# Altium PCB PCB1.PcbDoc
Units mil, origin at the board's own origin, x right, y up, seen from the top; angles counter-clockwise.
Board outline 2559.07 x 3937 mil, 4 copper layers (Top Layer, 3V, GND, Bottom Layer), stack 23.756 mil thick; 36 components, 33 nets, 176 pads, 41 vias.
Unrouted connection lines stored in the file: 17.
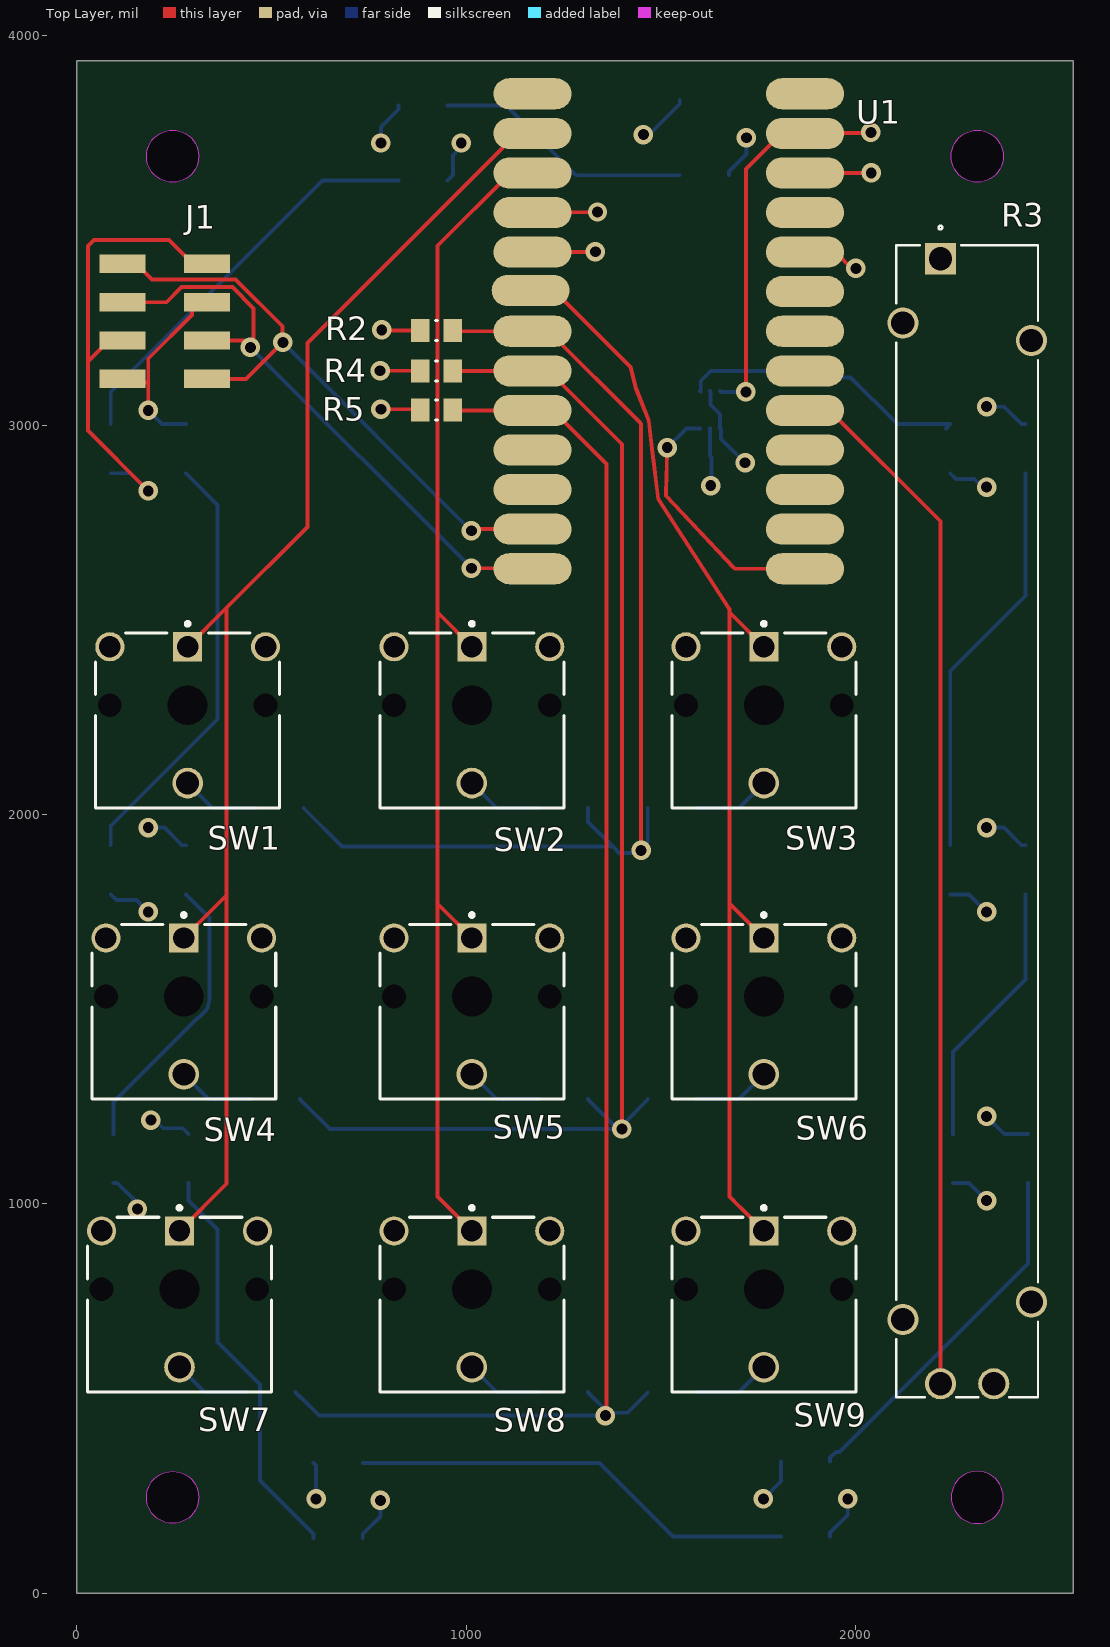
[diagram p0: Top Layer view]
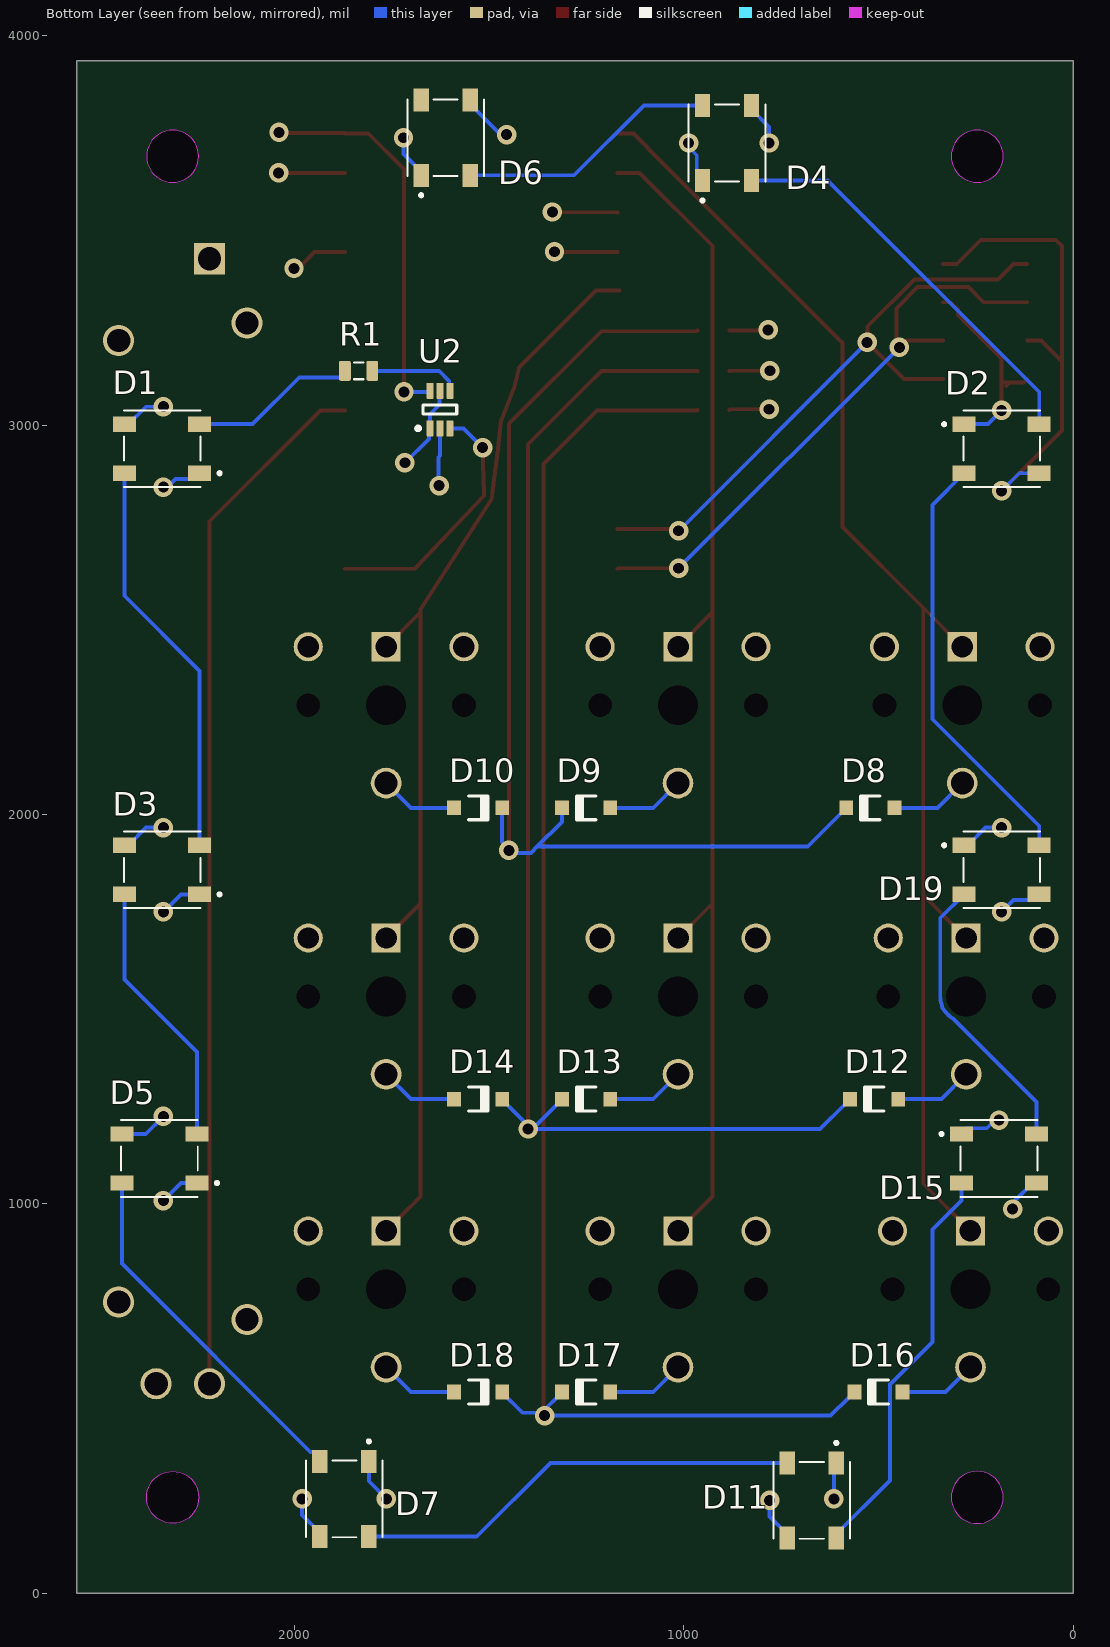
[diagram p1: Bottom Layer view, seen from below]
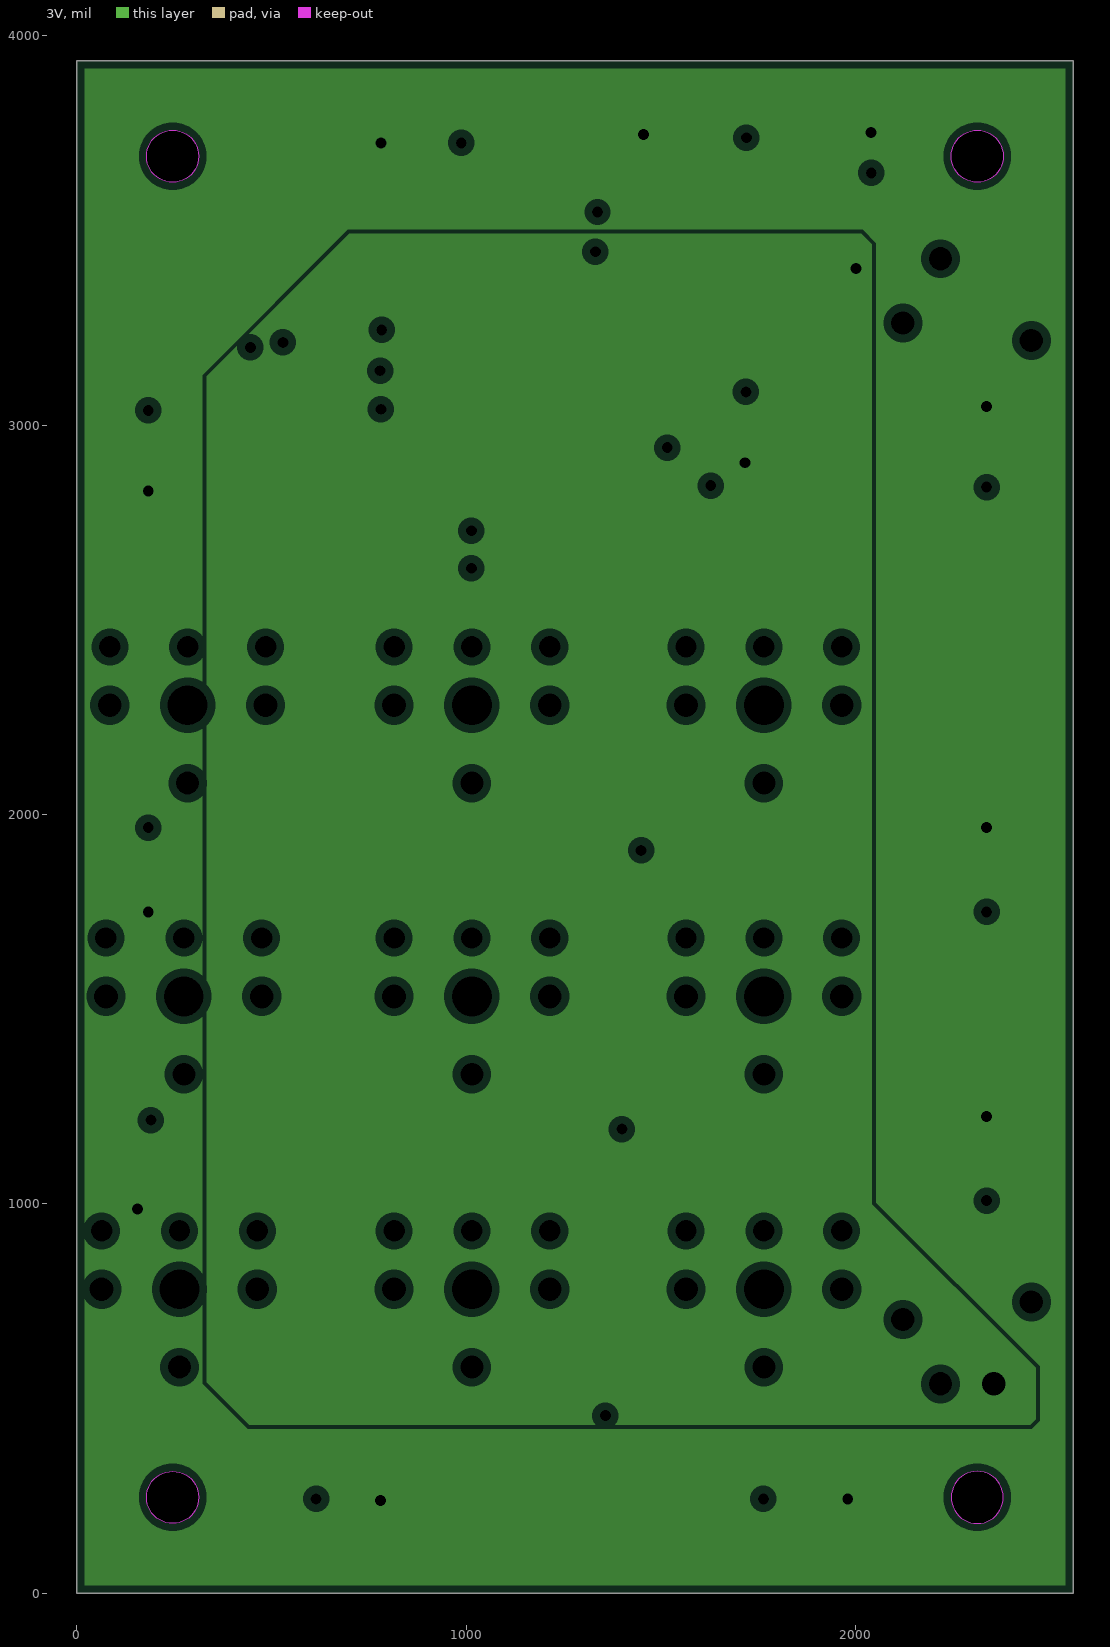
[diagram p2: 3V, clearances drawn from the general rule]
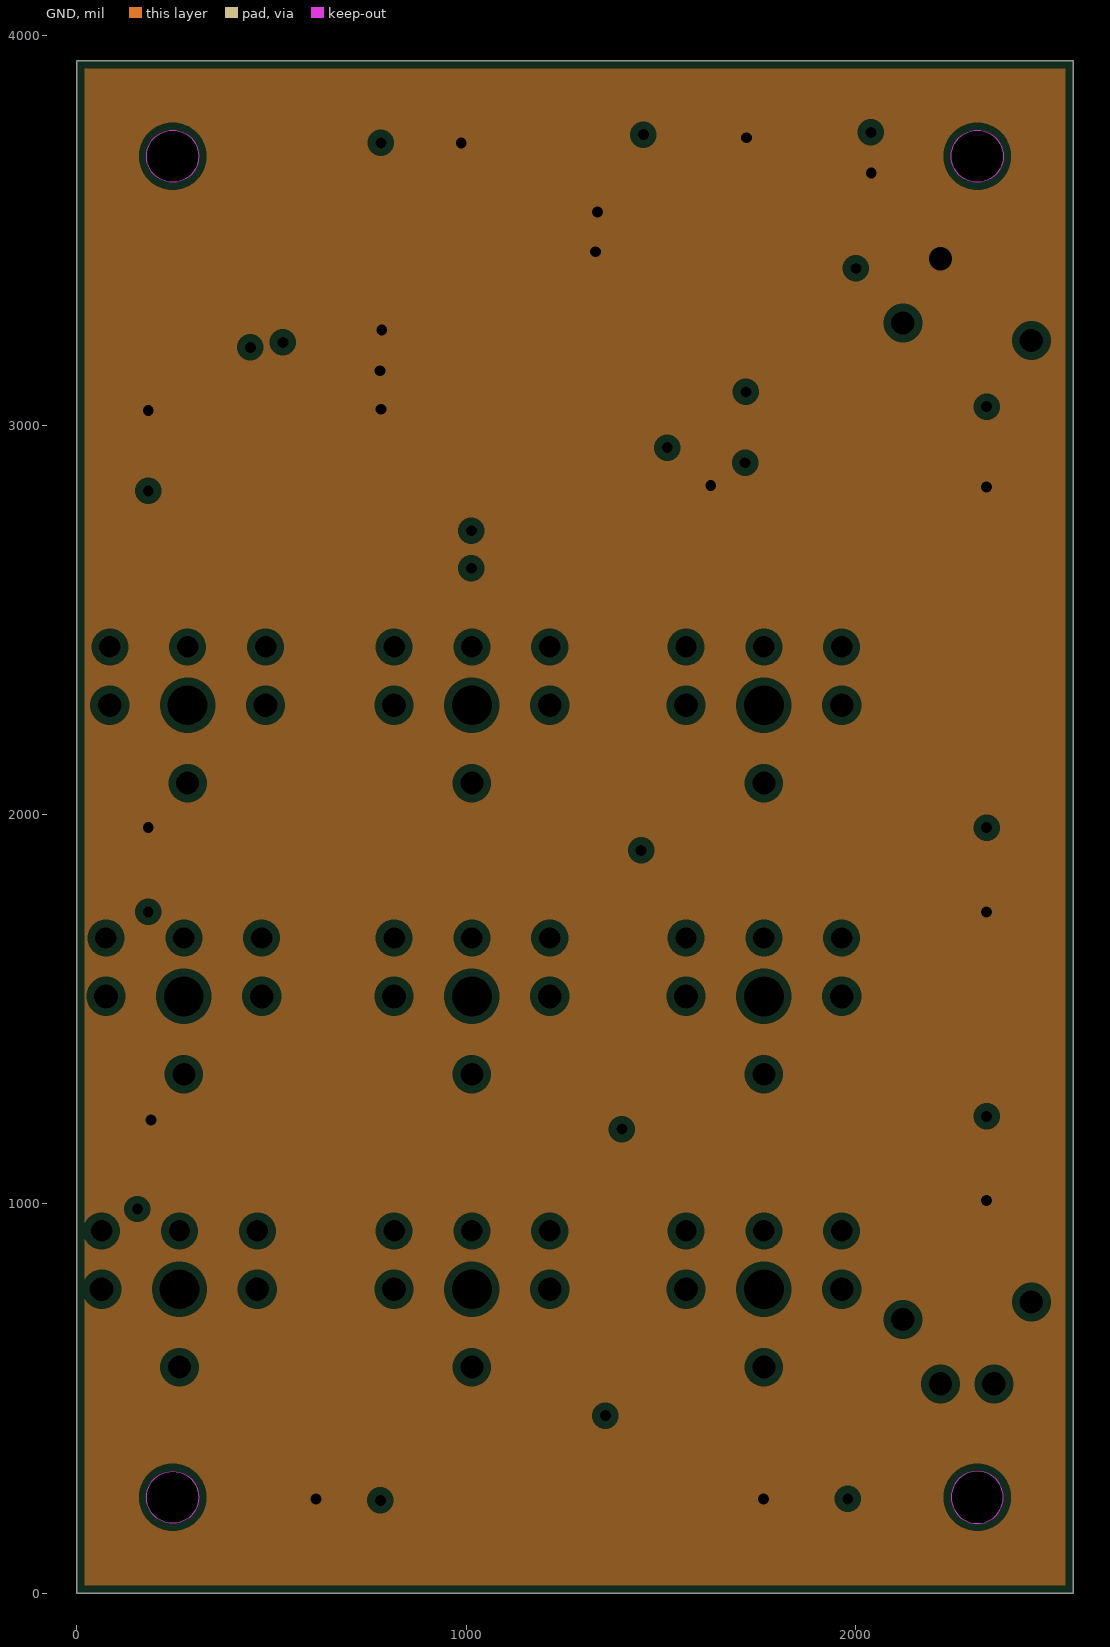
[diagram p3: GND, clearances drawn from the general rule]

## Layer stack, top to bottom
Top Solder: solder mask 0.4, Solder Resist, Dk 3.5
Top Layer: signal copper 1.4
Dielectric 2: prepreg 2.8, PP-006, Dk 4.1
3V: plane copper 1.378, net (Multiple Nets)
Dielectric 1: dielectric 12.6, FR-4, Dk 4.8
GND: plane copper 1.378, net GND
Dielectric 3: prepreg 2.8, PP-006, Dk 4.1
Bottom Layer: signal copper 1.4
Bottom Solder: solder mask 0.4, Solder Resist, Dk 3.5

## Board outline
0,0 2559.07,0 2559.07,3937 0,3937
cut-out: 2312.99,3624.02 cw(c2312.99,3690.94) 2246.06,3690.94 cw(c2312.99,3690.94) 2312.99,3757.87 cw(c2312.99,3690.94) 2379.92,3690.94 cw(c2312.99,3690.94)
cut-out: 246.06,3624.02 cw(c246.06,3690.94) 179.13,3690.94 cw(c246.06,3690.94) 246.06,3757.87 cw(c246.06,3690.94) 312.99,3690.94 cw(c246.06,3690.94)
cut-out: 2246.06,246.06 ccw(c2312.99,246.06) 2312.99,179.13 ccw(c2312.99,246.06) 2379.92,246.06 ccw(c2312.99,246.06) 2312.99,312.99 ccw(c2312.99,246.06)
cut-out: 246.06,3624.02 cw(c246.06,3690.94) 179.13,3690.94 cw(c246.06,3690.94) 246.06,3757.87 cw(c246.06,3690.94) 312.99,3690.94 cw(c246.06,3690.94)
cut-out: 246.06,179.13 cw(c246.06,246.06) 179.13,246.06 cw(c246.06,246.06) 246.06,312.99 cw(c246.06,246.06) 312.99,246.06 cw(c246.06,246.06)

## Design rules (kind name [scope] priority, off if disabled: settings)
Clearance Clearance_1 [All] p1: gap=10 ignorepadtopadclearanceinfootprint=FALSE except(5.91: Arc-SMDPad Track-SMDPad SMDPad-SMDPad; 7.87: Arc-Via Track-Via Via-Fill Via-Poly Via-Region; 9.84: Arc-Arc Arc-Track Track-Track; 13.78: Arc-THPad Track-THPad)
Clearance [All] p2 off: gap=10 ignorepadtopadclearanceinfootprint=FALSE
HoleSize HoleSize_1 [All] p1: absolutevalues=TRUE maxlimit=248.03 minlimit=5.91 maxpercent=80.000 minpercent=20.000
HoleSize [All] p2 off: absolutevalues=TRUE maxlimit=100 minlimit=1 maxpercent=80.000 minpercent=20.000
PlaneClearance [All] p1: clearance=20
PlaneConnect [All] p1: planeconnectstyle=Relief reliefexpansion=20 reliefentries=4 reliefconductorwidth=10 reliefairgap=10
PolygonConnect [All] p1: connectstyle=Relief reliefconductorwidth=10 reliefentries=4 polygonreliefangle="90 Angle" airgapwidth=10
RoutingVias [All] p1: holewidth=28 width=50 viastyle="Through Hole" minholewidth=28 minwidth=50 maxholewidth=28 maxwidth=50
SolderMaskExpansion [All] p1: expansion=4 istentingtop=FALSE
SupplyNets "Schematic Supply Nets_2" [InNet('GND')] p1: voltage=0.000
SupplyNets "Schematic Supply Nets_1" [InNet('3V3')] p2: voltage=0.000
SupplyNets "Schematic Supply Nets" [InNet('+5')] p3: voltage=0.000
Width "JLC Width" [All] p1: maxlimit=10 minlimit=6.3 preferedwidth=10 minimp=50.000000 maximp=50.000000 favimp=50.000000
Width [All] p2: maxlimit=10 minlimit=10 preferedwidth=10
27 further rules are at their usual default settings.

## Components (designator, comment, footprint, x,y, rotation, side; value= is the part's Value field where it differs from the comment)
D1 "1655" LED_1655 2340.08,2939.77 r0 bottom
D2 "1655" LED_1655 183.47,2939.77 r180 bottom
D3 "1655" LED_1655 2340.08,1858.09 r0 bottom
D4 "1655" LED_1655 889.04,3725.13 r90 bottom
D5 "1655" LED_1655 2346.9,1116.54 r0 bottom
D6 "1655" LED_1655 1611.75,3738.62 r90 bottom
D7 "1655" LED_1655 1872.02,242.05 r270 bottom
D8 "1N4148W-7-F" DIOD-SOD123-2_V 520.87,2017.15 r0 bottom
D9 "1N4148W-7-F" DIOD-SOD123-2_V 1250.98,2017.15 r0 bottom
D10 "1N4148W-7-F" DIOD-SOD123-2_V 1528.54,2017.15 r180 bottom
D11 "1655" LED_1655 671.3,238.18 r270 bottom
D12 "1N4148W-7-F" DIOD-SOD123-2_V 510.92,1269.14 r0 bottom
D13 "1N4148W-7-F" DIOD-SOD123-2_V 1250.98,1269.14 r0 bottom
D14 "1N4148W-7-F" DIOD-SOD123-2_V 1528.54,1269.14 r180 bottom
D15 "1655" LED_1655 190.29,1116.54 r180 bottom
D16 "1N4148W-7-F" DIOD-SOD123-2_V 499.83,516.72 r0 bottom
D17 "1N4148W-7-F" DIOD-SOD123-2_V 1250.98,516.72 r0 bottom
D18 "1N4148W-7-F" DIOD-SOD123-2_V 1528.54,516.72 r180 bottom
D19 "1655" LED_1655 183.47,1858.09 r180 bottom
J1 "NPTC042KFMS-RC" NPTC042KFMS-RC-Footprint-1 231.86,3276.71 r90 top
R1 "Resistor 470R +/-5% 0805 125 mW" RESC0805(2012)_L 1835.4,3139.83 r0 bottom value=470
R2 "Resistor 10k +/-1% 0805 125 mW" RESC2013X50X35ML15T15 923.92,3243.88 r0 top value=10k
R3 "PTA6043-2015DPB103" POT_PTA6043 2218.4,3427.77 r0 top
R4 "Resistor 10k +/-1% 0805 125 mW" RESC2013X50X35ML15T15 923.92,3139.19 r0 top value=10k
R5 "Resistor 10k +/-1% 0805 125 mW" RESC2013X50X35ML15T15 923.92,3039.68 r0 top value=10k
SW1 "ML1A-11JW" CHRY-ML1A-11JW_V 284.65,2280.93 r0 top
SW2 "ML1A-11JW" CHRY-ML1A-11JW_V 1014.76,2280.93 r0 top
SW3 "ML1A-11JW" CHRY-ML1A-11JW_V 1764.76,2280.93 r0 top
SW4 "ML1A-11JW" CHRY-ML1A-11JW_V 274.7,1532.92 r0 top
SW5 "ML1A-11JW" CHRY-ML1A-11JW_V 1014.76,1532.92 r0 top
SW6 "ML1A-11JW" CHRY-ML1A-11JW_V 1764.76,1532.92 r0 top
SW7 "ML1A-11JW" CHRY-ML1A-11JW_V 263.61,780.5 r0 top
SW8 "ML1A-11JW" CHRY-ML1A-11JW_V 1014.76,780.5 r0 top
SW9 "ML1A-11JW" CHRY-ML1A-11JW_V 1764.76,780.5 r0 top
U1 "KB2040" KB2040 1165.44,3891.5 r270 top
U2 "SN74LVC1T45DCKR" DCK0006A_M 1626.48,3040.23 r90 bottom

## Footprints (in the part's own frame and the unit in brackets; to place one, negate y for a bottom-side part, rotate by r counter-clockwise, add the part's x,y. Pads: shape width x height; smd on the part's side, far side on the other; paste and mask are expansions set on the pad)
CHRY-ML1A-11JW_V [mm] "Switch, 4-Leads, Body 12x11.4mm"
  rect 1.9x1.9 hole 1.4 paste-2539.97: 1(0,3.81)
  round 2 hole 1.5 paste-2539.97: 2(0,-5.08)
  round 1.9 hole 1.4 paste-2539.97: 3(-5.08,3.81) 4(5.08,3.81)
  round 0 hole 2.6 unplated paste-2539.97: MH1(0,0)
  round 0 hole 1.55 unplated paste-2539.97: MH2(-5.08,0) MH3(5.08,0)
  silkscreen extent -6,-6.7 6,5.43, body extent -6,-6.7 6,4.7, height 6.9
DCK0006A_M [mm] "SOT23, 6-Leads, Body 2.15x1.4mm, Pitch 0.65mm, IPC Low Density"
  rrect22% 1.05x0.45 smd: 1(-1.225,0.65) 2(-1.225,0) 3(-1.225,-0.65) 4(1.225,-0.65) 5(1.225,0) 6(1.225,0.65)
  silkscreen extent -1.35,-1.1 0.3,1.55, body extent -1.14,-1 1.14,1, height 0.94
DIOD-SOD123-2_V [mm] "SOD123, 2-Leads, Body 2.7x1.55mm, Height 1.45mm"
  rect 0.9x0.95 smd: 1(-1.575,0) 2(1.575,0)
  silkscreen extent -0.63,-0.83 0.64,0.77, body extent -1.35,-0.77 1.35,0.77, height 1.45
KB2040 [mil]
  oval 80x200 smd: 107(40,5) 108(141.67,5) 109(243.33,5) 110(345,5) 111(446.67,5) 112(545,0) 113(650,5) 114(751.67,5) 115(853.33,5) 116(955,5) 117(1056.67,5) 118(1158.33,5) 119(1260,5) 120(40,705) 121(141.67,705) 122(243.33,705) 123(345,705) 124(446.67,705) 125(548.33,705) 126(650,705) 127(751.67,705) 128(853.33,705) 129(955,705) 130(1056.67,705) 131(1158.33,705) 132(1260,705)
  body extent -48,0 1298,700, height 188
LED_1655 [mm]
  rect 1.5x1 smd: 1(-2.45,1.6) 2(-2.45,-1.6) 3(2.45,-1.6) 4(2.45,1.6)
  silkscreen extent -3.85,-2.5 2.5,2.5
NPTC042KFMS-RC-Footprint-1 [mm]
  rect 1.2x3 smd: 1(-4,2.9) 2(-1.5,2.9) 3(1,2.9) 4(3.5,2.9) 5(-4,-2.6) 6(-1.5,-2.6) 7(1,-2.6) 8(3.5,-2.6)
  body extent -5.63,-3.2 5.03,3.66, height 7.49
POT_PTA6043 [mil]
  rect 80x80 hole 60 paste-99999 mask+0: 1(0,0)
  round 80 / inner round 60 / far side round 80 hole 60 paste-99999 mask+0: 2(0,-2890) 3(137,-2890) 4(-96.5,-165) 5(-96.5,-2725) 6(233.5,-210) 7(233.5,-2680)
  silkscreen extent -114,-2925 250,85
RESC0805(2012)_L [mm] "Chip Resistor, Body 2.0x1.3mm, IPC High Density"
  rrect25% 0.76x1.3 smd: 1(-0.9,0) 2(0.89,0)
  silkscreen extent -0.3,-0.55 0.3,0.55, body extent -1,-0.62 1,0.63, height 0.6
RESC2013X50X35ML15T15 [mm] "Chip Resistor, 2-Leads, Body 2.2x1.4mm, IPC Low Density"
  rect 1.2x1.5 smd: 1(-1.05,0) 2(1.05,0)
  silkscreen extent -0.05,-0.65 0.05,0.65, body extent -1.1,-0.7 1.1,0.7, height 0.5

## Part data
D1 D2 D3 D4 D5 D6 D7 D11 D15 D19: library part CMP-004-00031-1, "Ws2812b 5050 Rgb Led With Integrated Driver Chip Pack Of 10", Case/Package=None, Availability=Unavailable, Component Type=Standard, Design Item ID=1655, MP=1655, Pins=4, Price=None, Source=1655.SchLib
D8 D9 D10 D12 D13 D14 D16 D17 D18: library part CMP-2000-04932-2, "Fast Switching Diode, 100 V, 0.15 A, -65 to 150 degC, 2-Pin?SOD123, RoHS, Tape and Reel", If - Forward Current=0.15A, Ir - Reverse Current=1uA, Manufacturer=DiodesIncorporated, Max Surge Current=2A, Maximum Operating Temperature=+150C, Minimum Operating Temperature=-65C, Operating Temperature Range=-65Cto+150C, Package / Case=SOD-123, Package Reference=SOD123-2, Peak Reverse Voltage=100V, Vf - Forward Voltage=1.25V, Brand=DiodesIncorporated, Configuration=Single, Datasheet URL=http://www.farnell.com/datasheets/1915529.pdf, Datasheet Version="Rev. 24-2, 10/2013", Factory Pack Quantity=3000, Height=1.25mm, Length=2.85mm, Manufacturer URL=http://www.diodes.com/, Mounting Style=SMD/SMT, Package URL=http://www.diodes.com/datasheets/ds18004.pdf, Packaging=Reel, Product=SwitchingDiodes, Product Category=Diodes-GeneralPurpose,Power,Switching, Recovery Time=4ns, RoHS=True, Series=1N4148, Type=SwitchingDiode, Unit Weight=0.000353oz, Width=1.7mm
J1: library part CMP-002-00071-6, "Board Connector, 8 Contact(s), 2 Row(s), Female, Straight, 0.1 inch Pitch, Surface Mount Terminal, Locking", Connector Type="BOARD CONNECTOR", Mounting Technology=Board, Number Of Connectors=1, RoHS Compliant=Yes
R1: library part CMP-009-00122-3, "Chip Resistor, 470 Ohms, +/-5%, 125 mW, -55 to 155 degC, 0805", Case/Package=0805, Max Operating Temperature=155°C, Min Operating Temperature=-55°C, Power=125mW, Tolerance=5%, Pins=2
R2 R4 R5: library part CMP-009-00018-5, "Chip Resistor, 10 KOhm, +/- 1%, 125 mW, -55 to 155 degC, 0805 (2012 Metric)", Case/Package=0805, Max Operating Temperature=155°C, Min Operating Temperature=-55°C, Power=125mW, Tolerance=1%, Voltage Rating=150V, Mounting Technology=SM, Pins=2, RoHS Compliant=True
R3: "No Description Available", Mfr_Name="Bourns Electronics"
SW1 SW2 SW3 SW4 SW5 SW6 SW7 SW8 SW9: library part CMP-2000-06718-1, "Keyboard Switch, SPST, IP40, 12 V Max, 10 mA Max, -40 to 70 degC, 4-Pin THD, RoHS, Bulk", Actuator Color=N/A, Dielectric Strength=500VAC, Illumination Color=N/R, IP Rating=IP40, Manufacturer=Cherry, Maximum AC Voltage Rating=12V, Maximum Current Rating=0.01A, Minimum Insulation Resistance=100MOhm, Operating Force=0.45N, Operating Speed=400mm/s, Operating Temperature=-10to70C, Package Description="4-Pin Through Hole Switch, Body 12 x 11.4 mm", Part No=ML1A11JW, Actuator Length=3mm, Actuator Material=N/A, Actuator Style=Button, Body Orientation=Straight, Contact Material=Gold/Silver, Contact Plating=N/A, COO=UK, Datasheet URL=http://www.cherry.de/PDF/EN_CHERRY_ML1A-xxxx.pdf, Datasheet Version=12/2015, Dimension=12x11.4x6.9mm, ECCN=EAR99, Electrical Life=N/A, Family=ML, Housing Material=N/A, HTS=8536509065, Illumination Type=N/R, Manufacturer URL=http://cherryswitches.com/cn/, Maximum DC Voltage Rating=12V, Maximum Power Rating=N/A, Mechanical Life=N/A, Mounting=ThroughHole, Mounting Technology=ThroughHole, Number of Terminals=2, Package Reference=ML1A-11JW, Package URL=http://cherryamericas.com/wp-content/uploads/2014/12/ml_cat.pdf, Packaging=N/A, Pole Throw Configuration=SPST, RoHS=Unknown, Row Spacing=10.16mm, Supplier=CherryElectrical, Switch Configuration=N/A, Terminal Pitch=N/R, Terminal Type=PCPins, Total Travel=3mm, Type=N/A
U1: "Keyboard IC breakour board", ComponentLink1Description=Datasheet, ComponentLink1URL=https://learn.adafruit.com/adafruit-kb2040/overview
U2: library part CMP-0859-00452-3, "Single-Bit Dual-Supply Bus Transceiver with Configurable Voltage Translation and 3-State Outputs, DCK0006A, LARGE T&R", F @ Nom Voltage(Max)(Mhz)=150, Generic Part Number=SN74LVC1T45, ICC @ Nom Voltage(Max)(mA)=0.004, Manufacturer="Texas Instruments", Operating Temperature Range(C)="-40 to 85", Rating=Catalog, tpd @ Nom Voltage(Max)(ns)=15.5,8,5.8,4.4, Voltage(Nom)(V)=1.8,2.5,3.3,5, 3-State Output=Yes, Bits(#)=1, DatasheetVersion=SCES515K, Input Type=CMOS/TTL, Logic=True, Output Drive (IOL/IOH)(Max)(mA)=32/-32, Output Type=CMOS, PackageReference=DCK0006A, Schmitt Trigger=No, Sub-Family="Dual Supply Translator", Technology Family=LVC, VCC(Max)(V)=5.5, VCC(Min)(V)=1.65

## Via types
v1: diameter 50, hole 28, Top Layer to Bottom Layer, 40 vias
v2: diameter 50/50 (per signal layer), hole 28, Top Layer to Bottom Layer, 1 vias

## Nets (pads, with @x,y where several pads share a name; then routed paths per layer and width w, separated by ;. In a path a pad name is that pad's centre, name@x,y a point inside that pad or via, vN(x,y) a via of type N, cw(c..) or ccw(c..) an arc to the next point about the centre after c; other vN are vias at no path point)
3V3: R3.3 U1.124 U2.1 U2.5 | length 374
  Top Layer w10: U1.124 1948.43,3444.83 1990.45,3402.82 v1(2001.27,3402.82)
  Bottom Layer w10: U2.5 1627.58,3087.35 1627.58,3052.78 1652.07,3028.3 U2.1 1654.87,2989.2 1654.87,2965.2 v1(1716.38,2903.68) ; R3.3@2352.74,540.43 R3.3
+5: D1.3 D2.3 D3.3 D4.3 D5.3 D6.3 D7.3 D11.3 D15.3 D19.3 J1.2 J1.8 U1.121 U2.6 | length 3313.8
  Top Layer w10: J1.2 82.26,3217.65 28.68,3164.08 ; v1(183.47,2831.5) 28.68,2986.29 28.68,3164.08 ; J1.8 298.79,3414.51 237.14,3476.16 44.45,3476.16 28.68,3460.39 28.68,3164.08 ; v1(1718.76,3085.89) 1718.76,3658.16 1810.44,3749.83 U1.121 1871.66,3751.05 2038.63,3751.05 v1(2039.85,3752.26)
  Bottom Layer w10: D19.3 101.7,1780.41 152.88,1780.41 v1(183.47,1749.82) ; D2.3 138.2,2876.77 v1(183.47,2831.5) ; D15.3 103.68,1053.55 147.79,1009.44 147.79,994.42 v1(155.44,986.77) ; D11.3 734.3,151.56 779.57,196.84 v1(779.57,238.18) ; v1(780.78,3725.13) 780.78,3766.47 826.05,3811.74 D4.3 ; v1(1455.32,3746.87) 1462.97,3754.52 1478.05,3754.52 1548.76,3825.24 D6.3 ; U2.6 1654.63,3085.89 v1(1718.76,3085.89) ; D7.3 1935.01,155.44 1980.29,200.71 v1(1980.29,242.05) ; v1(2336.9,1224.81) 2382.17,1179.54 D5.3 ; v1(2336.9,1966.35) 2381.42,1966.35 2426.7,1921.08 D3.3 ; v1(2336.9,3048.03) 2337.37,3047.56 2381.9,3047.56 2426.7,3002.76 D1.3
GND: D1.1 D2.1 D3.1 D4.1 D5.1 D6.1 D7.1 D11.1 D15.1 D19.1 J1.1 J1.7 R2.1 R3.1 R4.1 R5.1 U1.110 U1.111 U1.122 U2.2 | length 2489.2
  Top Layer w10: J1.1 127.01,3109.91 183.47,3109.91 ; J1.1@162.45,3109.91 J1.1@171.75,3100.61 ; v1(183.47,3038.19) 183.47,3109.91 ; J1.7 314.62,3316.08 296,3297.46 296,3283.32 183.47,3170.79 183.47,3109.91 ; v1(778.98,3139.99) 881.79,3139.99 R4.1 ; v1(780.83,3041.19) 881.08,3041.19 R5.1 ; v1(783.29,3244.81) 784.22,3243.88 R2.1 ; U1.111 1170.88,3445.28 1331.66,3445.28 v1(1332.1,3445.72) ; U1.110 1171.11,3547.17 1336.74,3547.17 v1(1337.41,3547.85) ; U1.122 1870.58,3648.31 2040.49,3648.31 v1(2040.63,3648.44)
  Bottom Layer w10: v1(183.47,1966.35) 224.81,1966.35 270.09,1921.08 D19.1 ; v1(183.47,3038.19) 218.91,3002.76 D2.1 ; v1(190.29,1214.97) 201.12,1214.97 221.86,1194.22 272.06,1194.22 D15.1 ; D11.1 614.43,328.52 v1(614.43,242.32) ; D4.1 966.72,3643.36 966.72,3693.56 987.47,3714.3 v1(987.47,3725.13) ; U2.2 1626.62,2991.86 1626.62,2921.74 1630.42,2917.94 1630.42,2846.9 v2(1628.38,2844.87) ; D6.1 1674.75,3652.01 1720.02,3697.28 v1(1720.02,3738.62) ; v1(1763.75,242.05) 1809.03,287.33 D7.1 ; D3.1 2291.62,1795.09 v1(2336.9,1749.82) ; D1.1 2258.31,2862.09 2305.33,2862.09 2326.07,2841.34 v1(2336.9,2841.34) ; D5.1 2291.62,1053.55 v1(2336.9,1008.28)
LED_Din: U1.132 U2.3 | length 666.3
  Top Layer w10: v1(1516.7,2942.57) 1513.28,2823.15 1513.27,2823.01 1513.27,2818.89 1687.36,2634.53 1690.39,2631.5 U1.132
  Bottom Layer w10: v1(1516.7,2942.57) 1566.12,2992 U2.3
  other v1: 1516.7,2942.57
LIN_POT: R3.2 U1.128 | length 2681.5
  Top Layer w10: U1.128 1933.64,3038.17 2218.4,2753.41 R3.2
NetD1_2: D1.2 R1.2 | length 449.5
  Bottom Layer w10: R1.2 1870.44,3132.94 1880.4,3122.98 1987.77,3122.98 2107.99,3002.76 D1.2 D1.2@2232.65,2991.79
NetD1_4: D1.4 D3.2 | length 1035.6
  Bottom Layer w10: D3.2 2243.62,2369.28 2436.54,2562.19 D1.4
NetD2_2: D2.2 D19.4 | length 1103.1
  Bottom Layer w10: D19.4 87.02,1970.38 361.42,2244.78 361.42,2795.29 D2.2
NetD2_4: D2.4 D4.2 | length 1046.5
  Bottom Layer w10: D2.4 87.02,3084.98 630.71,3628.67 D4.2
NetD3_4: D3.4 D5.2 | length 692.6
  Bottom Layer w10: D5.2 2250.44,1390.37 2436.54,1576.47 D3.4
NetD4_4: D4.4 D6.2 | length 671
  Bottom Layer w10: D4.4 1102.72,3821.59 1282.14,3642.17 D6.2
NetD5_4: D5.4 D7.2 | length 931.4
  Bottom Layer w10: D7.2 1935.01,348.35 1949.7,363.04 1959.54,363.04 2443.36,846.85 D5.4
NetD7_4: D7.4 D11.2 | length 1153
  Bottom Layer w10: D11.2 1342.7,334.63 1531.74,145.59 D7.4
NetD8_1: D8.1 SW1.2 | length 200.6
  Bottom Layer w10: SW1.2 348.43,2017.15 D8.1
NetD9_1: D9.1 SW2.2 | length 200.6
  Bottom Layer w10: SW2.2 1078.54,2017.15 D9.1
NetD10_1: D10.1 SW3.2 | length 200.6
  Bottom Layer w10: D10.1 1700.98,2017.15 SW3.2
NetD11_4: D11.4 D15.2 | length 1045
  Bottom Layer w10: D15.2 286.75,1008.73 361.52,933.95 361.52,644.86 470.54,535.84 470.54,293.47 470.54,289.33 473.27,286.6 608.31,151.56 D11.4
NetD12_1: D12.1 SW4.2 | length 200.6
  Bottom Layer w10: SW4.2 338.48,1269.14 D12.1
NetD13_1: D13.1 SW5.2 | length 200.6
  Bottom Layer w10: SW5.2 1078.54,1269.14 D13.1
NetD14_1: D14.1 SW6.2 | length 200.6
  Bottom Layer w10: D14.1 1700.98,1269.14 SW6.2
NetD15_4: D15.4 D19.2 | length 741.9
  Bottom Layer w10: D15.4 93.83,1261.22 308.83,1476.21 ccw(c274.7,1532.92) 326.32,1491.5 335.27,1502.65 338.81,1516.5 ccw(c284.44,1532.82) 341.21,1532.82 341.21,1733.81 D19.2
NetD16_1: D16.1 SW7.2 | length 200.6
  Bottom Layer w10: SW7.2 327.39,516.72 D16.1
NetD17_1: D17.1 SW8.2 | length 200.6
  Bottom Layer w10: SW8.2 1078.54,516.72 D17.1
NetD18_1: D18.1 SW9.2 | length 200.6
  Bottom Layer w10: D18.1 1700.98,516.72 SW9.2
NetR1_1: R1.1 U2.4 | length 236.9
  Bottom Layer w10: U2.4@1602.62,3086.72 U2.4 1602.62,3090.19 1602.62,3114.2 1628.26,3139.83 R1.1
READ0: SW1.1 SW4.1 SW7.1 U1.108 | length 3515.8
  Top Layer w10: SW7.1 384.86,1051.75 384.86,1791.45 ; SW4.1 383.23,1791.45 384.86,1791.45 ; SW1.1 384.86,2531.14 ; U1.108 1129.38,3749.83 1091.74,3712.19 1091.74,3710.75 592.13,3211.14 592.13,2738.42 384.86,2531.14 ; 384.86,1791.45 384.86,2531.14
READ1: SW2.1 SW5.1 SW8.1 U1.109 | length 3134.7
  Top Layer w10: SW8.1 926.64,1018.62 926.64,1766.98 ; SW5.1 930.7,1766.98 926.64,1766.98 ; SW2.1 929.7,2515.99 926.64,2515.99 ; U1.109 1113.67,3648.17 926.64,3461.13 926.64,2515.99 ; 926.64,1766.98 926.64,2515.99
READ2: SW3.1 SW6.1 SW9.1 U1.112 | length 2909
  Top Layer w10: U1.112 1225.44,3346.5 1419.51,3152.43 1422.44,3149.5 1436.42,3094.29 1469.12,3011.94 1478.45,2928.07 1482.14,2899.17 1489.66,2840.18 1493.43,2810.68 1675.99,2527.99 1675.99,2519.71 ; SW9.1 1704.36,990.9 1703.99,990.9 1675.99,1018.9 1675.99,1771.69 ; SW6.1 1675.99,1771.69 ; SW3.1 1675.99,2519.71 ; 1675.99,1771.69 1675.99,2519.71
SCAN0: D8.2 D9.2 D10.2 R2.2 U1.113 | length 2839.5
  Top Layer w10: R2.2 967.64,3241.5 U1.113 1211.5,3241.5 1446.35,3006.65 1449.28,3003.72 v1(1449.28,1907.73)
  Bottom Layer w10: D8.2 582.88,2016.17 681.48,1917.56 1376.78,1917.56 ; D9.2 1312.99,1981.36 1376.78,1917.56 ; D10.2 1466.53,1929.66 1449.28,1912.41 v1(1449.28,1907.73) 1443.13,1901.58 1392.76,1901.58 1376.78,1917.56
SCAN1: D12.2 D13.2 D14.2 R4.2 U1.114 | length 3355.8
  Top Layer w10: R4.2 965.9,3139.83 1211.5,3139.83 1249.86,3101.47 1400.1,2951.23 v1(1400.1,1192.23)
  Bottom Layer w10: D12.2 572.93,1268.15 585.65,1255.43 586.63,1255.43 649.83,1192.23 v1(1400.1,1192.23) ; D13.2 1312.99,1268.15 1381.25,1199.88 1392.45,1199.88 v1(1400.1,1192.23) ; D14.2 1466.53,1268.15 1400.1,1201.72 v1(1400.1,1192.23)
SCAN2: D16.2 D17.2 D18.2 R5.2 U1.115 | length 3922
  Top Layer w10: R5.2 966.78,3038.17 U1.115 1222.66,3038.17 1360.1,2900.72 1360.1,468.62 v1@1365.24,463.48
  Bottom Layer w10: D16.2 561.84,515.74 574.56,503.02 575.54,503.02 622.73,455.83 v1(1357.59,455.83) v1@1365.24,463.48 ; D17.2 1312.99,515.74 v1@1365.24,463.48 ; D18.2@1466.53,515.74 1414.28,463.48 v1@1365.24,463.48
SCL_0: J1.3 J1.6 U1.119 | length 1557.1
  Top Layer w10: J1.3 230.34,3316.08 268.96,3354.7 399.49,3354.7 453.86,3300.33 453.86,3208.04 v1(445.99,3200.16) 428.49,3217.65 J1.6 ; v1@1012,2634.15 v1(1013.32,2632.82) 1169.12,2632.82 U1.119
  Bottom Layer w10: v1(445.99,3200.16) v1@1012,2634.15
  other v1: 445.99,3200.16
SDA_0: J1.4 J1.5 U1.118 | length 1595.4
  Top Layer w10: J1.4 153.12,3414.51 192.93,3374.7 407.78,3374.7 528.22,3254.26 528.22,3212.8 434.65,3119.23 J1.5 ; v1(1013.54,2729.1) 1017.6,2733.17 U1.118
  Bottom Layer w10: v1@528.22,3212.8 v1(529.03,3212.8) 1012.73,2729.1 v1(1013.54,2729.1)
pads on no net: D6.4 R3.4 R3.5 R3.6 R3.7 SW1.3 SW1.4 SW1.MH1 SW1.MH2 SW1.MH3 SW2.3 SW2.4 SW2.MH1 SW2.MH2 SW2.MH3 SW3.3 SW3.4 SW3.MH1 SW3.MH2 SW3.MH3 SW4.3 SW4.4 SW4.MH1 SW4.MH2 SW4.MH3 SW5.3 SW5.4 SW5.MH1 SW5.MH2 SW5.MH3 SW6.3 SW6.4 SW6.MH1 SW6.MH2 SW6.MH3 SW7.3 SW7.4 SW7.MH1 SW7.MH2 SW7.MH3 SW8.3 SW8.4 SW8.MH1 SW8.MH2 SW8.MH3 SW9.3 SW9.4 SW9.MH1 SW9.MH2 SW9.MH3 U1.107 U1.116 U1.117 U1.120 U1.123 U1.125 U1.126 U1.127 U1.129 U1.130 U1.131

## Polygon pours and split planes (outlines as drawn)
+5 on 3V (split plane): 2538.97,20.1 20.1,20.1 20.1,3916.91 2538.97,3916.91
3V3 on 3V (split plane): 2043,3464.2 2043,1001.26 2043.39,999.31 2044.49,997.66 2463.8,578.35 2463.8,446.65 2448.82,431.67 442.56,431.67 332.49,541.75 332.49,3125.1 700.02,3492.63 2014.57,3492.63
GND on GND (split plane): 2538.97,20.1 20.1,20.1 20.1,3916.91 2538.97,3916.91

## Other copper
3V (plane layer: these items are gaps in the copper):
  lines w10: 327.39,539.64 440.45,426.57 2450.93,426.57 2468.9,444.54 2468.9,580.46 2048.1,1001.26 2048.1,3466.32 2016.68,3497.73 697.91,3497.73 327.39,3127.21 327.39,539.64

## Silkscreen, mask and mechanical layers (free items; w line width, h text height)
Mechanical 1:
  circle w10: c2312.99,3690.94 r66.93
  circle w10: c246.06,3690.94 r66.93
  circle w10: c2312.99,246.06 r66.93
  circle w10: c246.06,246.06 r66.93